# Altium PCB PCB.PcbDoc
Units mm, origin at the board's own origin, x right, y up, seen from the top; angles counter-clockwise.
Board outline 37.08 x 54.87 mm, 2 copper layers (Top Layer, Bottom Layer); 23 components, 31 nets, 116 pads, 42 vias.
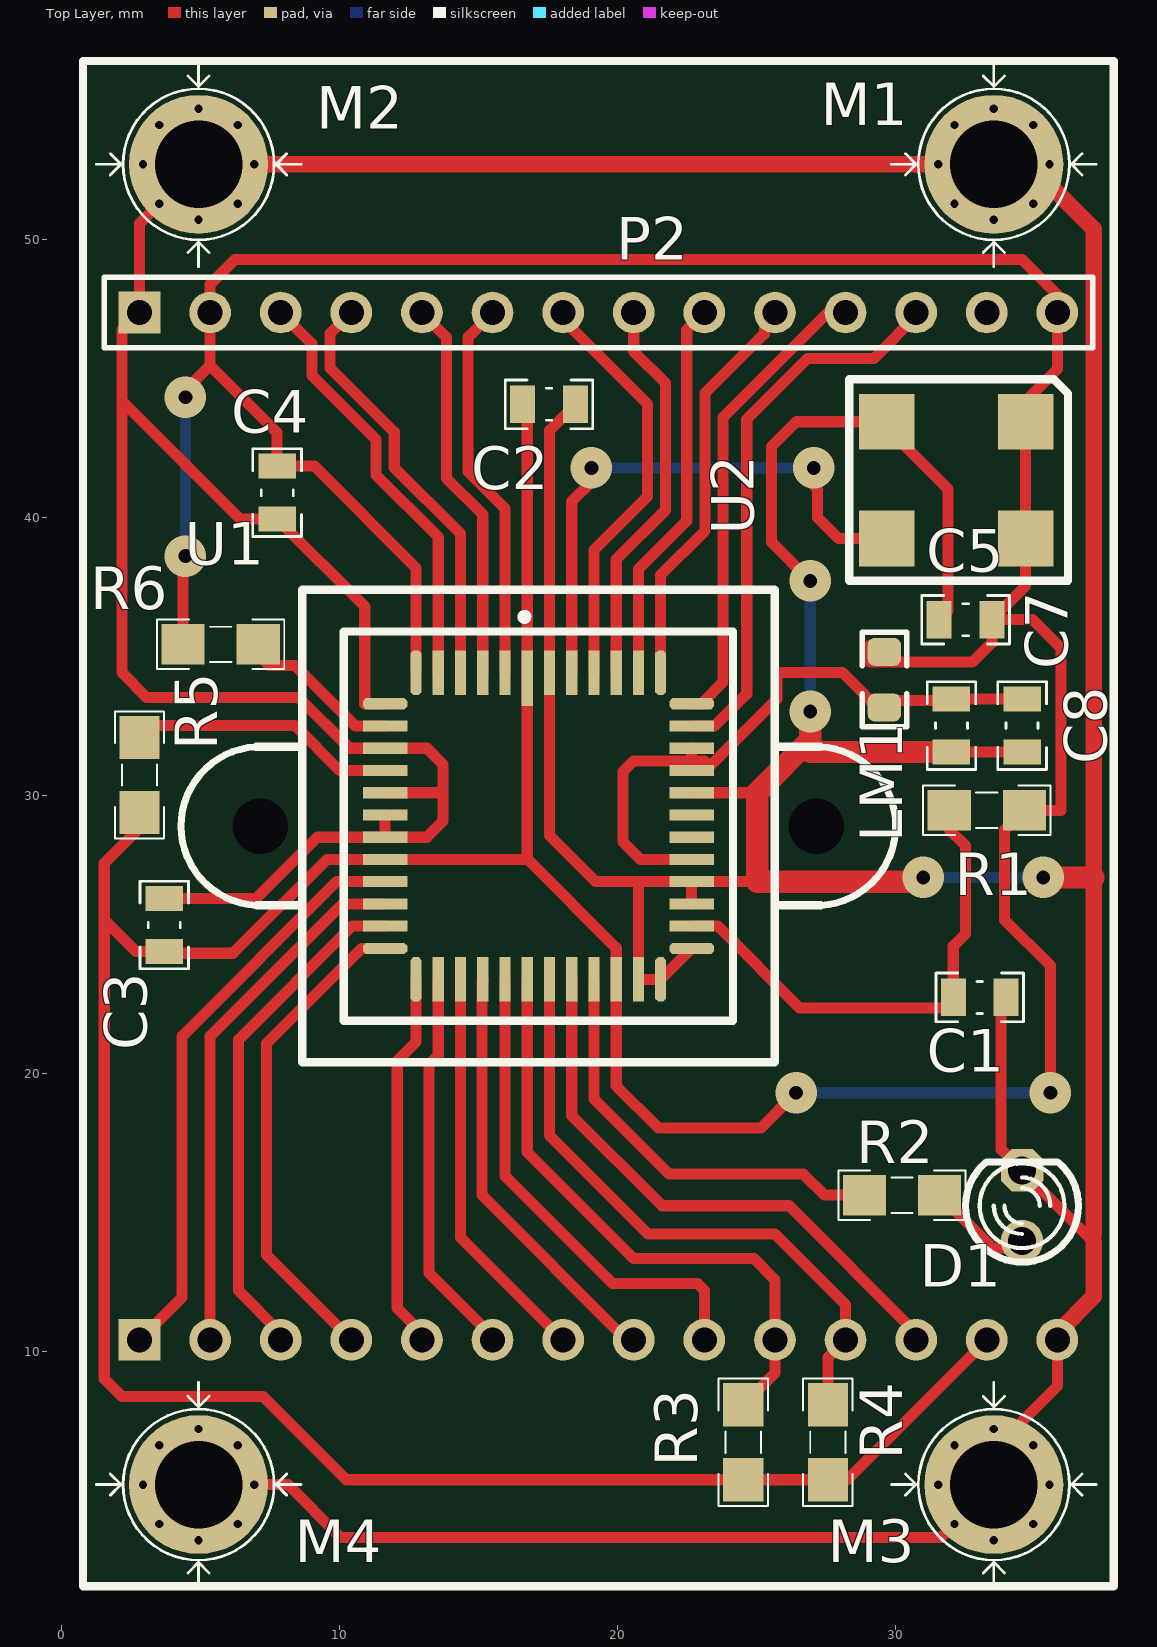
[diagram p0: Top Layer view]
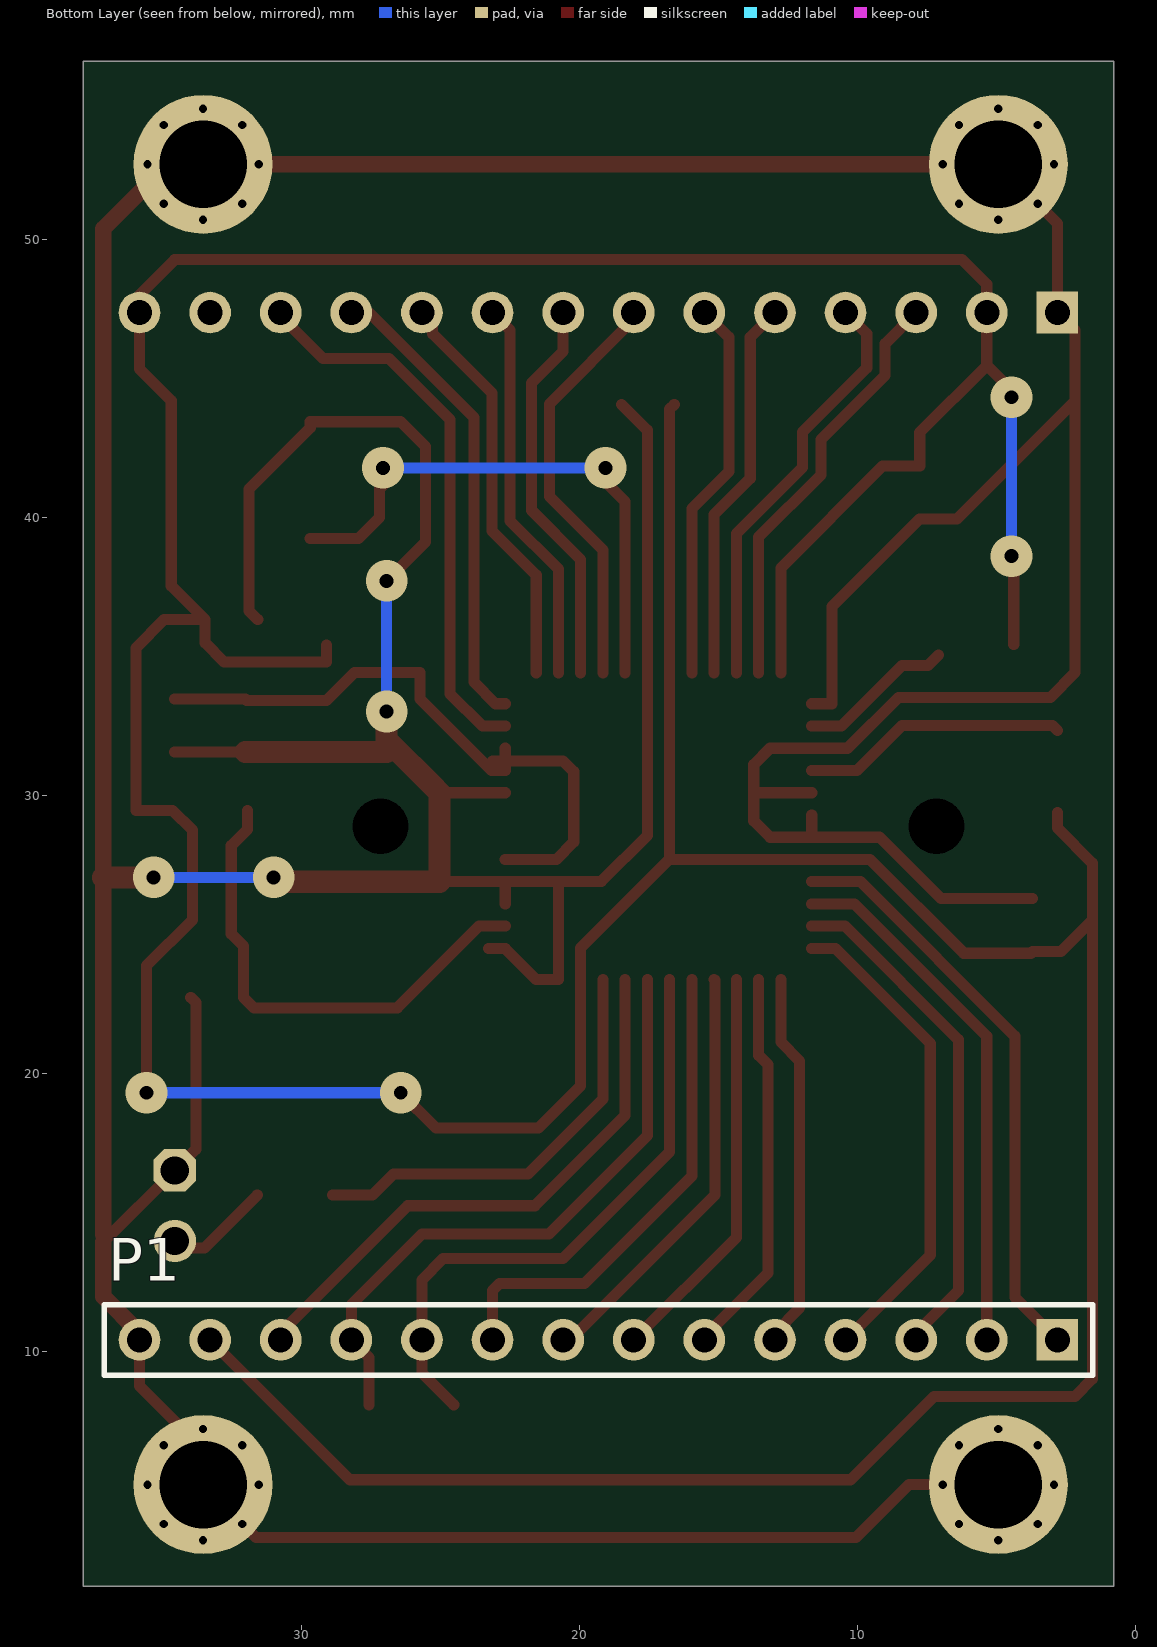
[diagram p1: Bottom Layer view, seen from below]
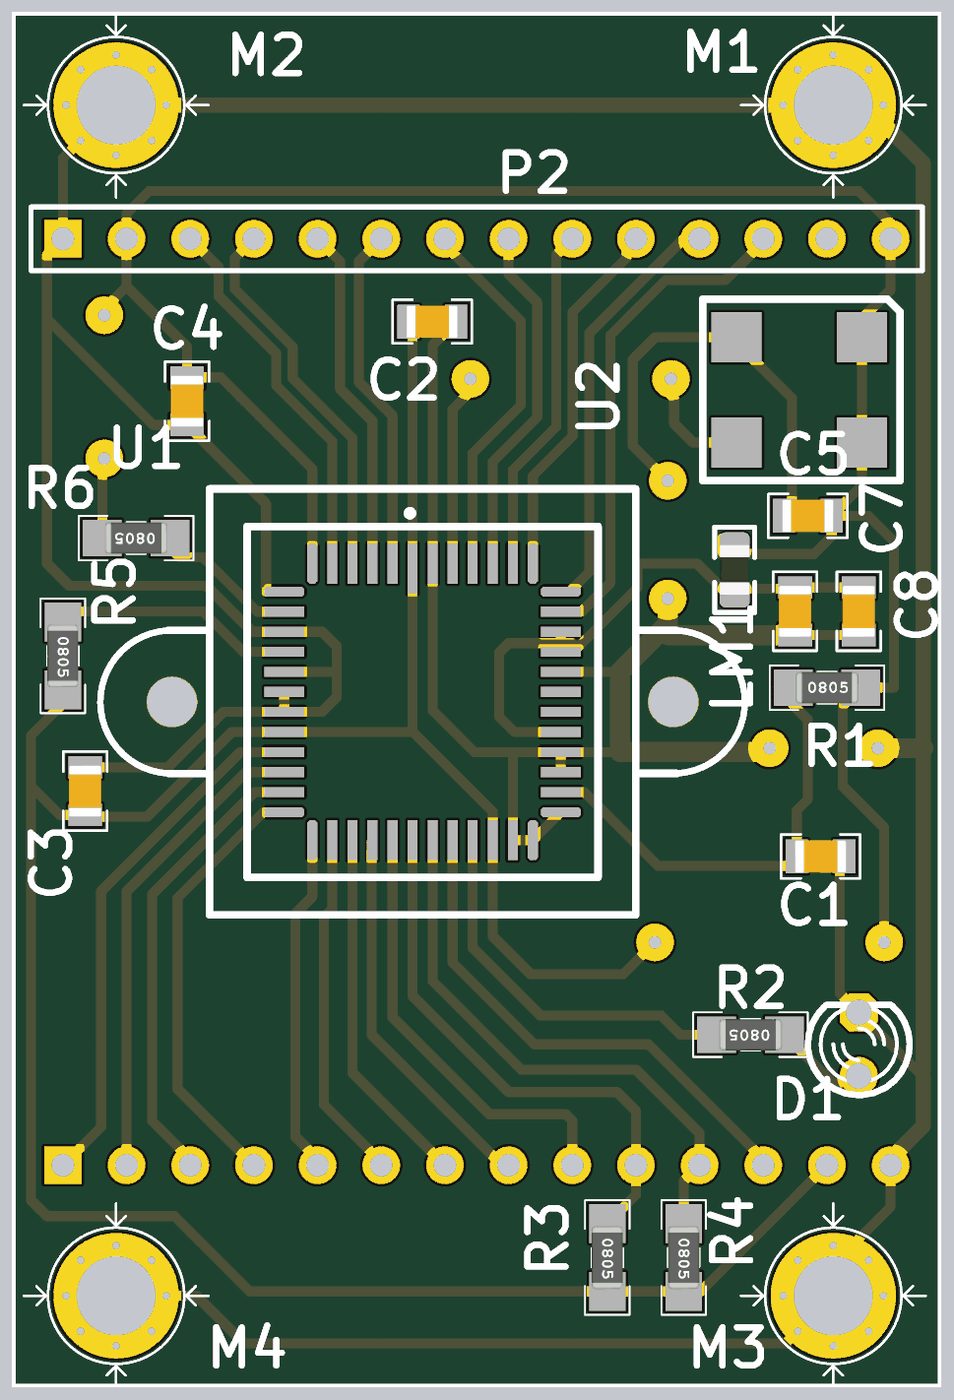
[diagram p2: 3D render of the assembled board from above, using the file's embedded part models]

## Layer stack, top to bottom
Top Solder: solder mask 0.0102, Solder Resist, Dk 3.5
Top Layer: signal copper 0.0356
Dielectric 1: dielectric 0.32, FR-4, Dk 4.8
Bottom Layer: signal copper 0.0356
Bottom Solder: solder mask 0.0102, Solder Resist, Dk 3.5

## Board outline
0.762,1.547 0.762,56.42 37.846,56.42 37.846,1.547

## Design rules (kind name [scope] priority, off if disabled: settings)
Clearance [All] p1: gap=0.254 ignorepadtopadclearanceinfootprint=FALSE except(0: Arc-Hole Track-Hole SMDPad-Hole THPad-Hole Via-Hole Fill-Hole Poly-Hole Region-Hole Text-Hole)
PolygonConnect [All] p1: connectstyle=Relief reliefconductorwidth=0.254 reliefentries=4 polygonreliefangle="90 Angle" airgapwidth=0.254
RoutingVias [All] p1: holewidth=0.711 width=1.27 viastyle="Through Hole" minholewidth=0.711 minwidth=1.27 maxholewidth=0.711 maxwidth=1.27
SolderMaskExpansion [All] p1: expansion=0.102
Width [All] p1: maxlimit=1 minlimit=0.254 preferedwidth=0.254 minimp=50.000000 maximp=50.000000 favimp=50.000000
30 further rules are at their usual default settings.

## Components (designator, comment, footprint, x,y, rotation, side; value= is the part's Value field where it differs from the comment)
C1 "" CAP0805 33.02,22.733 r180 top
C2 "" CAP0805 17.526,44.069 r0 top
C3 "" CAP0805 3.683,25.339 r90 top
C4 "" CAP0805 7.747,40.894 r270 top
C5 "" CAP0805 32.512,36.322 r180 top
C7 "" CAP0805 32.004,32.512 r270 top
C8 "" CAP0805 34.544,32.512 r270 top
D1 "LED" My_LED3MM 34.544,15.24 r90 top
LM1 "10uH" 0805L 29.591,34.163 r270 top value=FB805
M1 "Screw3mm" "Board Screw 3mm" 33.528,52.705 r0 top
M2 "Screw3mm" "Board Screw 3mm" 4.918,52.705 r0 top
M3 "Screw3mm" "Board Screw 3mm" 33.528,5.207 r0 top
M4 "Screw3mm" "Board Screw 3mm" 4.918,5.207 r0 top
P1 "Header 14" HDR1X14 2.794,10.414 r0 bottom
P2 "Header 14" HDR1X14 2.794,47.371 r0 top
R1 "10K" RESC3413X04N 33.274,29.464 r0 top
R2 "100" RESC3413X04N 30.226,15.621 r180 top
R3 "1.5K" RESC3413X04N 24.511,6.731 r270 top
R4 "1.5K" RESC3413X04N 27.559,6.731 r270 top
R5 "1K" RESC3413X04N 2.794,30.734 r270 top
R6 "1K" RESC3413X04N 5.715,35.433 r180 top
U1 "MT9V034" MT9V034 17.143,28.897 r0 top
U2 "XTAL_SMD_27Mhz" XTAL_SMD 34.671,43.443 r180 top

## Footprints (in the part's own frame and the unit in brackets; to place one, negate y for a bottom-side part, rotate by r counter-clockwise, add the part's x,y. Pads: shape width x height; smd on the part's side, far side on the other; paste and mask are expansions set on the pad)
0805L [mm] ",0805, 2012, 200X130"
  rrect50% 1x1.2 smd mask+0.075: 1(-1,0) 2(1,0)
  Top Layer pour cut-out: -0.5,0.8 0.5,0.8 0.5,-0.8 -0.5,-0.8
  silkscreen extent -1.7,-0.8 1.7,0.8, body extent -1,-0.6 1,0.6, height 0.95
"Board Screw 3mm" [mm]
  round 5 hole 3.15 mask+0.1: S(0,0)
  silkscreen extent -3.68,-3.68 3.68,3.68
CAP0805 [mm] "Chip Capacitor, 2-Leads, Body 2/00x1/25mm, IPC Medium Density DESIGNER:ABBAS BASEREH"
  rect 0.9x1.35 smd: 1(-0.95,0) 2(0.95,0)
  silkscreen extent -1.58,-0.87 1.58,0.87, body extent -1.02,-0.65 1.02,0.65, height 0.5
HDR1X14 [mm] "Connector; Header; 14 Position"
  rect 1.5x1.5 hole 0.9: 1(0,0)
  round 1.5 hole 0.9: 2(2.54,0) 3(5.08,0) 4(7.62,0) 5(10.16,0) 6(12.7,0) 7(15.24,0) 8(17.78,0) 9(20.32,0) 10(22.86,0) 11(25.4,0) 12(27.94,0) 13(30.48,0) 14(33.02,0)
  silkscreen extent -1.27,-1.27 34.29,1.27
MT9V034 [mm]
  rect 0.4x2 smd: 1(-0.4,5.315)
  rect 0.4x1.6 smd: 2(-1.2,5.515) 3(-2,5.515) 4(-2.8,5.515) 5(-3.6,5.515) 20(-3.6,-5.515) 21(-2.8,-5.515) 22(-2,-5.515) 23(-1.2,-5.515) 24(-0.4,-5.515) 25(0.4,-5.515) 26(1.2,-5.515) 27(2,-5.515) 28(2.8,-5.515) 29(3.6,-5.515) 44(3.6,5.515) 45(2.8,5.515) 46(2,5.515) 47(1.2,5.515) 48(0.4,5.515)
  oct 0.4x1.6 smd: 6(-4.4,5.515) 19(-4.4,-5.515) 30(4.4,-5.515) 43(4.4,5.515)
  oct 1.6x0.4 smd: 7(-5.515,4.4) 18(-5.515,-4.4) 31(5.515,-4.4) 42(5.515,4.4)
  rect 1.6x0.4 smd: 8(-5.515,3.6) 9(-5.515,2.8) 10(-5.515,2) 11(-5.515,1.2) 12(-5.515,0.4) 13(-5.515,-0.4) 14(-5.515,-1.2) 15(-5.515,-2) 16(-5.515,-2.8) 17(-5.515,-3.6) 32(5.515,-3.6) 33(5.515,-2.8) 34(5.515,-2) 35(5.515,-1.2) 36(5.515,-0.4) 37(5.515,0.4) 38(5.515,1.2) 39(5.515,2) 40(5.515,2.8) 41(5.515,3.6)
  round 0 hole 2: ""(-10,0) ""(10,0)
  silkscreen extent -12.86,-8.5 12.86,8.5
My_LED3MM [mil]
  round 60 hole 40: A(-50,0)
  oct 60x60 hole 40: K(50,0)
  silkscreen extent -80,-80 62,80
RESC3413X04N [mm] "Chip Resistor, 2-Leads, Body 3/40x1/30mm, IPC Medium Density-Design:Abbas Basereh"
  rect 1.55x1.45 smd: 1(-1.35,0) 2(1.35,0)
  silkscreen extent -2.29,-0.89 2.29,0.89, body extent -1.25,-0.62 1.25,0.62, height 0.79
XTAL_SMD [mm]
  rect 2x2 smd: 1(0,0) 2(5,0) 3(5,4.2) 4(0,4.2)
  silkscreen extent -1.52,-1.52 6.35,5.72

## Part data
C1 C2 C3 C4 C5 C7 C8: library part "CAP SMD PACKAGE", "TOTAL CAPACITOR SMD PACK", Data=2017-3-10, Desc.="CAP SMD TOTAL PACKAGES", Designer="Abbas Basereh"
D1: "Typical INFRARED GaAs LED", LatestRevisionDate=08-Jul-2005, LatestRevisionNote="Mech Layer 1 removed.", Published=8-Jun-2000, Publisher="Altium Limited"
LM1: library part "L SMA 0.25W", "Inductor", Code_IEC=1005, Code_JEITA=0402, LatestRevisionDate=29-May-2009, LatestRevisionNote="IPC-7351 Footprint Added.", PackageDescription="Chip Inductor", PackageReference=0402-A, Published=8-Jun-2000, Publisher="Altium Limited"
M1 M2 M3 M4: library part "Board Screw 3mm", "Board Screw With Spacer 3mm", Data=16-12-2016, Designer="Abbas Basereh"
P1 P2: "Header, 14-Pin", LatestRevisionDate=17-Jul-2002, LatestRevisionNote="Re-released for DXP Platform.", Publisher="Altium Limited"
R1 R2 R3 R4 R5 R6: library part "RES 0805 0.125W", "RES 0805", Data=16-12-2016, Desc.="RES SMD 0805", Designer="Abbas Basereh"
U2: library part XTAL_SMD

## Via types
v1: diameter 0.5, hole 0.3, Top Layer to Bottom Layer, 32 vias
v2: diameter 1.5, hole 0.5, Top Layer to Bottom Layer, 10 vias

## Nets (pads, with @x,y where several pads share a name; then routed paths per layer and width w, separated by ;. In a path a pad name is that pad's centre, name@x,y a point inside that pad or via, vN(x,y) a via of type N, cw(c..) or ccw(c..) an arc to the next point about the centre after c; other vN are vias at no path point)
D0: P2.8 U1.45 | length 14.2
  Top Layer w0.4: U1.45 19.943,38.485 21.717,40.259 21.717,44.831 20.574,45.974 P2.8
D1: P2.9 U1.44 | length 13.9
  Top Layer w0.4: U1.44 20.743,38.142 22.479,39.878 22.479,46.736 P2.9
D2: P2.10 U1.43 | length 14.7
  Top Layer w0.4: U1.43 21.543,37.926 23.133,39.516 23.133,44.469 25.273,46.609 25.273,46.99 P2.10
D3: P2.11 U1.42 | length 16.9
  Top Layer w0.4: U1.42 23.01,33.297 23.787,34.074 23.787,43.599 27.559,47.371 P2.11
D4: P2.12 U1.41 | length 20.3
  Top Layer w0.4: U1.41 23.48,32.497 24.638,33.655 24.638,43.525 26.833,45.72 29.21,45.72 30.861,47.371 P2.12
D5: P1.1 U1.15 | length 21.2
  Top Layer w0.4: P1.1 4.318,11.938 4.318,21.336 9.879,26.897 U1.15
D6: P1.2 U1.16 | length 19.2
  Top Layer w0.4: P1.2 5.334,21.336 10.095,26.097 U1.16
D7: P1.3 U1.17 | length 18.4
  Top Layer w0.4: P1.3 7.874,10.668 6.35,12.192 6.35,21.209 10.438,25.297 U1.17
D8: P1.4 U1.18 | length 17.6
  Top Layer w0.4: P1.4 7.366,13.462 7.366,21.082 10.781,24.497 U1.18
D9: P1.5 U1.19 | length 13.6
  Top Layer w0.4: U1.19 12.743,21.125 12.065,20.447 12.065,11.557 12.954,10.668 P1.5
EXPOSURE: P1.9 U1.23 | length 17.7
  Top Layer w0.4: U1.23 15.943,16.315 19.812,12.446 22.86,12.446 23.114,12.192 P1.9
FRAME_VALID: P1.7 U1.21 | length 14.5
  Top Layer w0.4: U1.21 14.343,14.105 P1.7
GND: C1.1 C2.2 C3.2 C4.2 C5.2 C7.2 C8.2 D1.K M1.S M2.S M3.S M4.S P1.14 P2.1 U1.7 U1.9 U1.11 U1.12 U1.13 U1.29 U1.30 U1.31 U1.33 U1.34 U1.38 U1.48 U2.2 | length 267.6
  Top Layer w0.4: C3.2 6.985,26.289 9.193,28.497 U1.13 ; M4.S v1(6.918,5.207) 8.128,5.207 10.033,3.302 31.623,3.302 v1(32.114,3.793) M3.S 33.528,6.477 35.814,8.763 P1.14 P1.14@35.814,10.668 ; M2.S v1(3.504,51.291) 2.794,50.581 P2.1 2.159,46.736 2.159,44.196 ; U1.12 U1.13 ; U1.11 13.714,30.097 13.716,30.099 ; U1.7 10.899,33.297 10.899,36.792 C4.2 6.411,39.944 2.159,44.196 ; C2.2 17.543,43.136 U1.48 17.543,28.558 19.204,26.897 U1.34 ; 20.743,26.797 U1.29 U1.30 U1.31 U1.31@23.255,24.497 ; U1.33 U1.34 ; U1.38 25.019,30.097 25.147,30.225 ; 25.019,26.897 U1.34 ; v2(26.924,37.719) 25.527,39.116 25.527,42.545 26.425,43.443 U2.2 29.671,43.227 31.877,41.021 31.877,36.637 C5.2 ; v2@30.707,26.897 30.861,27.051 v2(30.988,27.051) ; C7.2 C8.2 ; C1.1 33.782,22.545 33.782,17.272 D1.K 37.118,13.936 ; 2.159,44.196 2.159,34.417 3.048,33.528 8.509,33.528 10.34,31.697 U1.9 13.134,31.697 13.716,31.115 13.716,30.099 ; U1.13 13.13,28.497 13.716,29.083 13.716,30.099
  Top Layer w0.6: M2.S v1(6.918,52.705) v1(31.528,52.705) M1.S 34.798,52.705 37.118,50.385 37.118,27.051 37.118,14.19 ; P1.14@35.814,10.668 37.118,11.972 37.118,13.936
  Top Layer w0.8: 25.019,30.097 25.019,26.897 v2@30.707,26.897 ; 25.147,30.225 26.924,32.002 v2(26.924,33.02) ; 26.924,31.562 C7.2 ; v2(35.306,27.051) 37.118,27.051
  Bottom Layer w0.4: v2(26.924,33.02) v2(26.924,37.719) ; v2(30.988,27.051) v2(35.306,27.051)
  other v1: 4.918,3.207 33.528,3.207 3.504,3.793 6.332,3.793 34.942,3.793 2.918,5.207 31.528,5.207 35.528,5.207 3.504,6.621 6.332,6.621 32.114,6.621 34.942,6.621 4.918,7.207 33.528,7.207 4.918,50.705 33.528,50.705 6.332,51.291 32.114,51.291 34.942,51.291 2.918,52.705 35.528,52.705 3.504,54.119 6.332,54.119 32.114,54.119 34.942,54.119 4.918,54.705 33.528,54.705
LINE_VALID: P1.6 U1.20 | length 14.1
  Top Layer w0.4: U1.20 13.543,20.655 13.208,20.32 13.208,12.827 15.494,10.541 P1.6
LVDS_CLK_N: P2.6 U1.2 | length 13.9
  Top Layer w0.4: P2.6 14.605,46.482 14.605,41.656 15.943,40.318 U1.2
LVDS_CLK_P: P2.5 U1.3 | length 13.9
  Top Layer w0.4: P2.5 13.843,46.482 13.843,41.402 15.143,40.102 U1.3
LVDS_DATA_N: P2.4 U1.4 | length 15.2
  Top Layer w0.4: P2.4 9.652,46.609 9.652,45.375 11.957,43.07 11.957,41.8 14.343,39.414 U1.4
LVDS_DATA_P: P2.3 U1.5 | length 15.3
  Top Layer w0.4: P2.3 8.998,46.247 8.998,45.104 11.303,42.799 11.303,41.529 13.543,39.289 U1.5
MAIN_CLOCK: U1.47 U2.3 | length 21.1
  Top Layer w0.4: U1.47 18.343,40.568 19.05,41.275 v2(19.05,41.783) ; v2@27.051,41.656 26.797,41.91 26.543,41.656 27.178,41.021 27.178,40.005 27.94,39.243 U2.3
  Bottom Layer w0.4: v2(19.05,41.783) v2(27.051,41.783)
NetC1_2: C1.2 R1.1 U1.32 | length 17.9
  Top Layer w0.4: U1.32 23.598,25.297 26.543,22.352 31.689,22.352 C1.2 32.07,24.577 32.512,25.019 32.512,28.194 31.924,28.782 R1.1
NetD1_A: D1.A R2.1 | length 4.2
  Top Layer w0.4: R2.1 33.481,13.716 34.798,13.716 D1.A@34.925,13.843
NetR2_2: R2.2 U1.27 | length 15.5
  Top Layer w0.4: U1.27 19.143,19.084 21.844,16.383 26.67,16.383 27.432,15.621 R2.2
NetR5_1: R5.1 U1.10 | length 9.6
  Top Layer w0.4: R5.1@2.794,32.338 2.968,32.512 8.382,32.512 9.997,30.897 U1.10
NetR6_1: R6.1 U1.8 | length 5.6
  Top Layer w0.4: R6.1@7.065,35.052 7.446,34.671 8.382,34.671 10.556,32.497 U1.8
PIXEL_CLK: P2.7 U1.46 | length 15
  Top Layer w0.4: P2.7 18.034,47.117 21.063,44.088 21.063,40.748 19.143,38.828 U1.46
SCL: P1.11 R4.1 U1.25 | length 22.7
  Top Layer w0.4: U1.25 17.543,17.763 21.082,14.224 25.654,14.224 28.194,11.684 P1.11 27.559,9.779 R4.1
SDA: P1.10 R3.1 U1.24 | length 22
  Top Layer w0.4: U1.24 16.743,17.166 20.574,13.335 24.892,13.335 25.654,12.573 P1.10 25.654,9.224 R3.1
STFRM: P1.12 U1.26 | length 20.8
  Top Layer w0.4: U1.26 18.343,18.487 21.59,15.24 26.162,15.24 30.734,10.668 P1.12
STLIN: P1.8 U1.22 | length 15.4
  Top Layer w0.4: U1.22 15.113,23.352 15.113,15.621 20.32,10.414 P1.8
VCC: C2.1 C3.1 C4.1 C5.1 LM1.1 P1.13 P2.2 R1.2 R3.2 R4.2 R5.2 R6.2 U1.1 U1.6 U1.14 U1.28 U2.1 U2.4 | length 215.6
  Top Layer w0.4: 1.587,25.463 2.662,24.389 C3.1 3.749,24.323 6.162,24.323 9.536,27.697 U1.14 16.764,27.697 ; R5.2 2.794,28.829 1.524,27.559 1.524,9.017 2.159,8.382 7.239,8.382 10.24,5.381 R3.2 R4.2 28.241,5.381 P1.13 ; R6.2 4.365,38.528 v2(4.445,38.608) ; v2(4.445,44.323) 4.445,44.577 5.334,45.466 ; U1.6 12.743,38.184 9.083,41.844 C4.1 7.747,43.053 5.334,45.466 ; C2.1 16.743,43.902 U1.1 16.743,27.718 16.764,27.697 ; v2(26.416,19.304) 25.146,18.034 21.463,18.034 19.943,19.554 U1.28 19.943,24.518 16.764,27.697 ; LM1.1@29.083,35.417 29.083,34.798 32.766,34.798 33.462,35.494 C5.1 ; v2(35.56,19.304) 35.56,23.876 33.909,25.527 33.909,28.749 R1.2 35.941,29.464 35.941,35.306 34.925,36.322 C5.1 ; 5.334,45.466 P2.2 5.334,48.387 6.223,49.276 34.544,49.276 35.814,48.006 35.814,45.339 34.671,44.196 U2.1 U2.4 34.671,37.531 C5.1
  Bottom Layer w0.4: v2(4.445,38.608) v2(4.445,44.323) ; v2(26.416,19.304) v2(35.56,19.304)
VCCA: C7.1 C8.1 LM1.2 U1.35 U1.39 U1.40 | length 23.5
  Top Layer w0.4: U1.35 20.817,27.697 20.193,28.321 20.193,30.861 20.574,31.242 22.658,31.242 ; U1.40 22.658,31.242 ; 23.113,31.242 22.658,31.242 ; C8.1 C7.1 31.959,33.417 29.083,33.417 28.083,34.417 25.72,34.417 25.72,33.467 23.15,30.897 U1.39 22.658,31.242
pads on no net: P2.13 P2.14 U1. U1.36 U1.37

## Silkscreen, mask and mechanical layers (free items; w line width, h text height)
Top Overlay:
  the board outline again, w0.3